# EAGLE board pic_board_with_lcd (EAGLE 6.1)
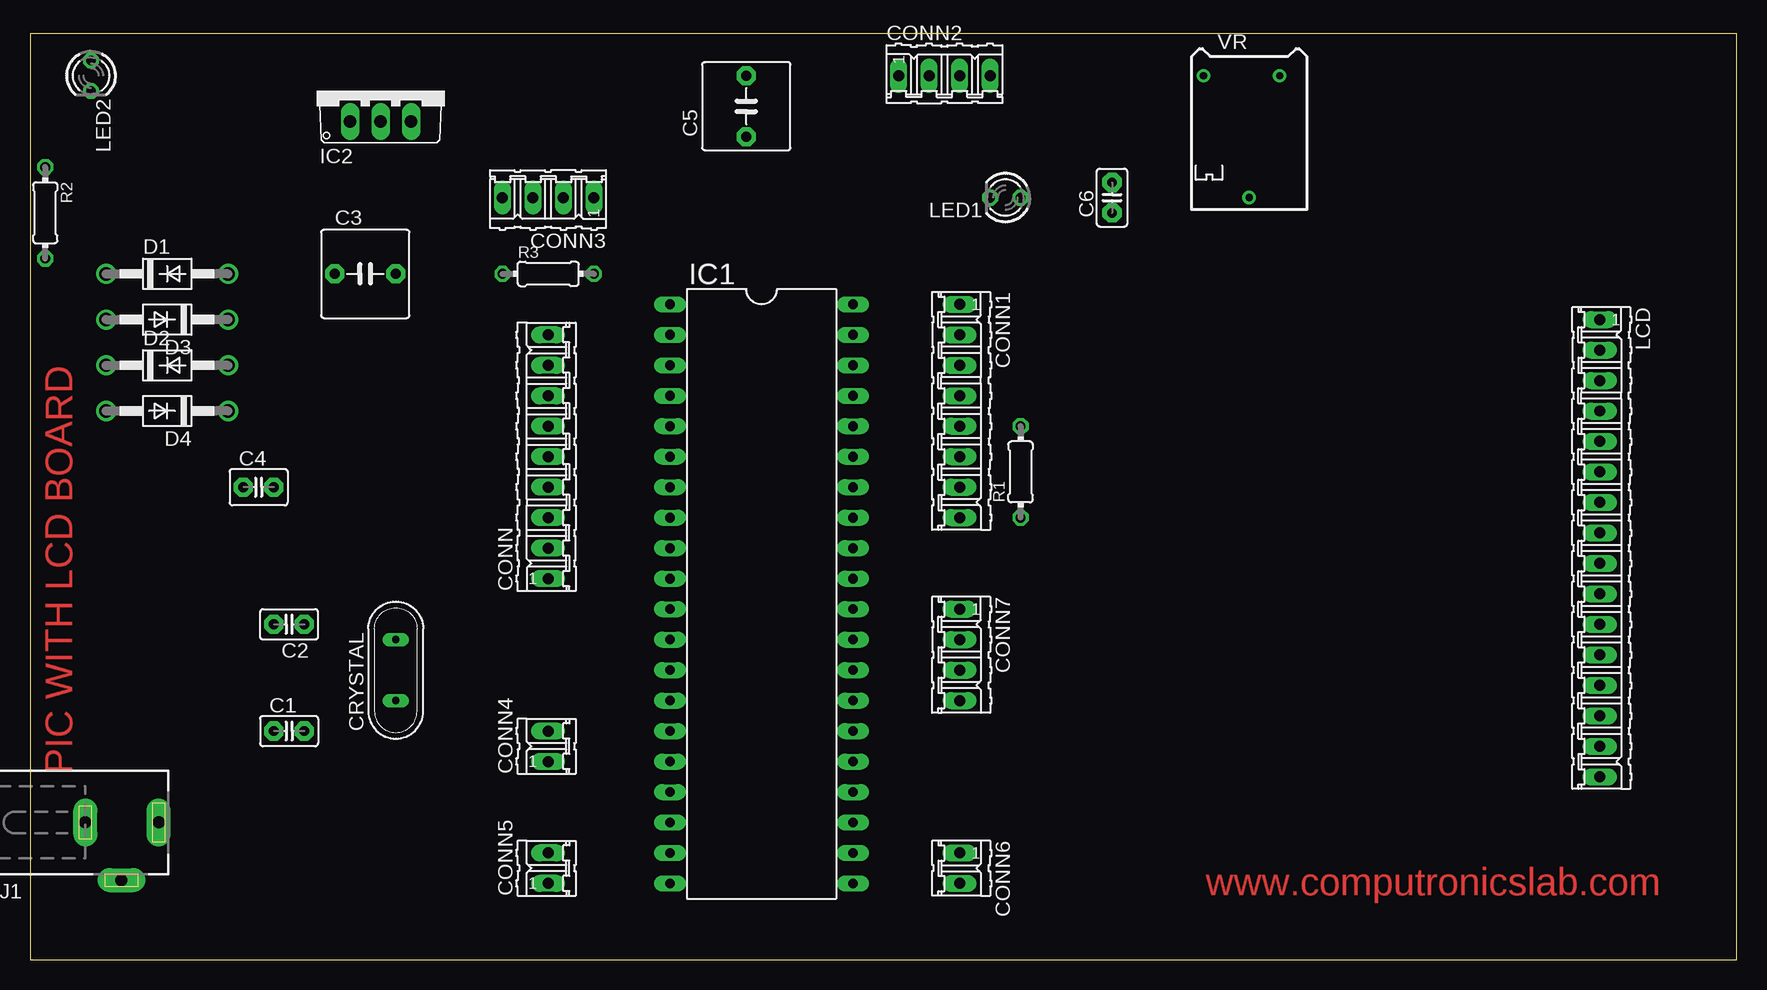
[diagram p0: board, top side]
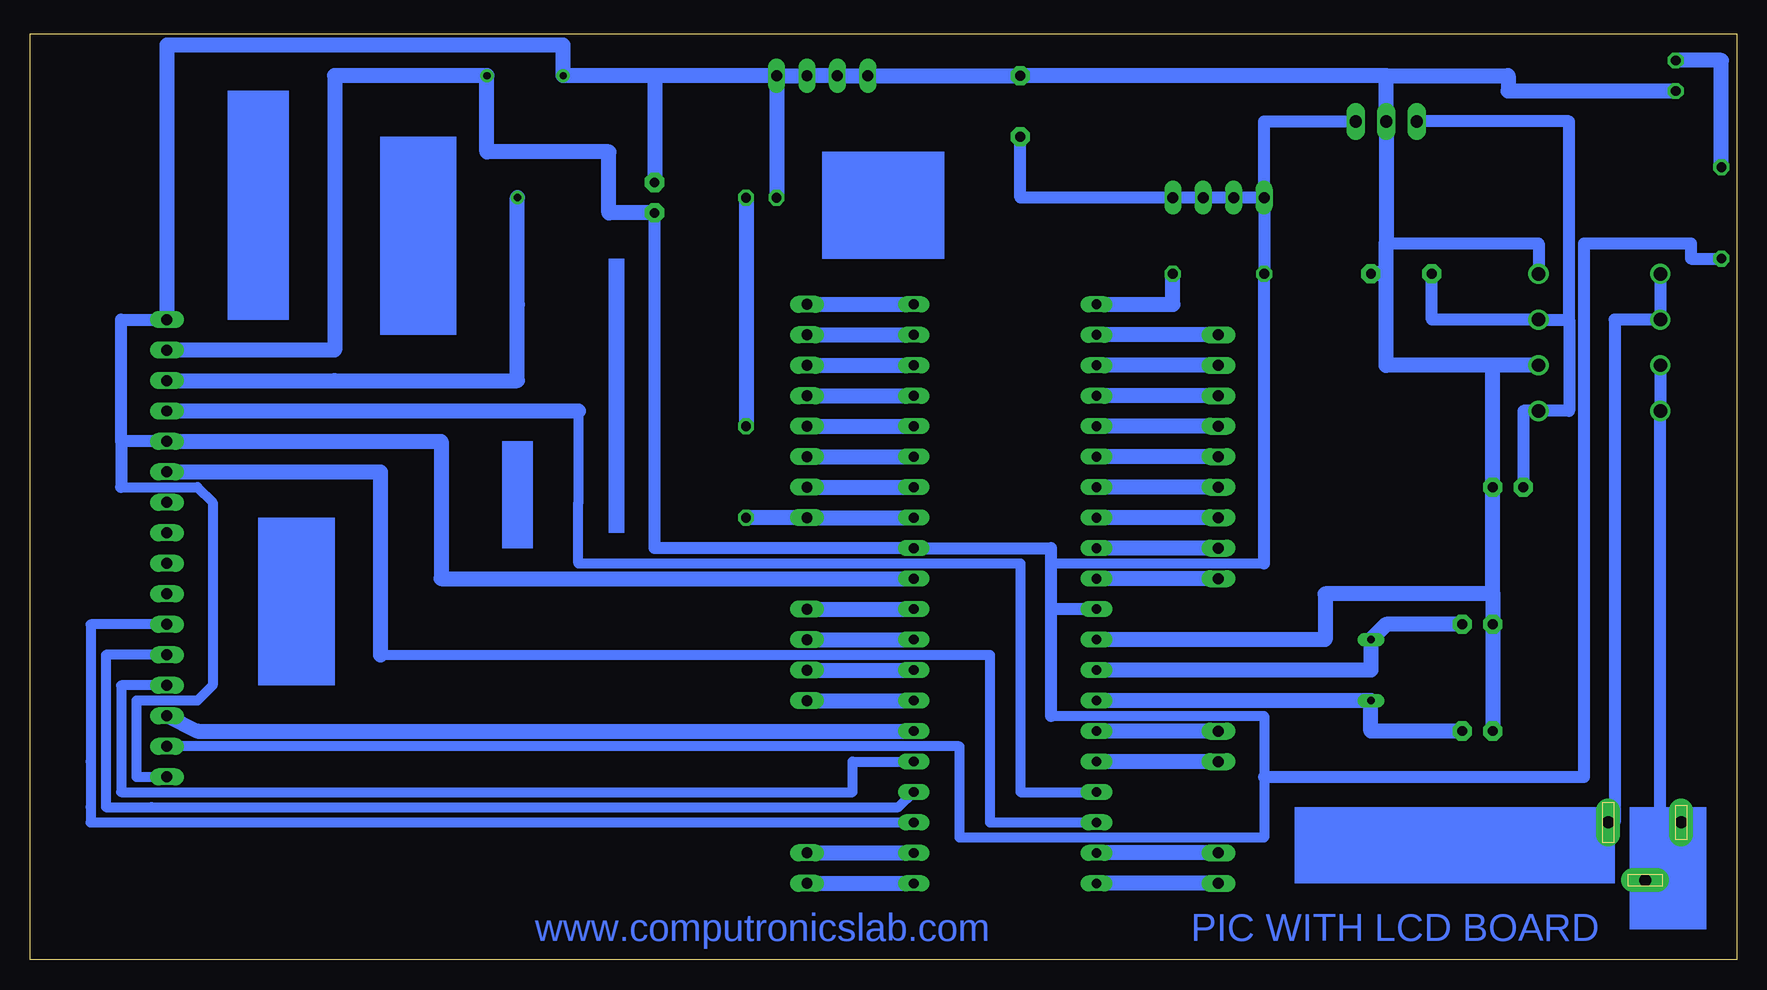
[diagram p1: board, bottom side, seen from below]

Size 142.22 x 77.14 mm. Coordinates in mm from the lower left corner, seen from the top.
Outline: 0,0 142.22,0 142.22,77.14 0,77.14 0,0
Copper layers (1*16): Top 0.035mm / dielectric 1.5mm / Bottom 0.035mm
Design rules: minimum track width 20mil, minimum drill 24mil, track to track 8mil, track to pad 8mil, pad to pad 8mil, via to via 8mil, smd to smd 8mil, copper to edge 40mil, drill to drill 8mil, minimum pad ring 10mil, minimum via ring 8mil, stop-mask expansion 4mil, vias tented up to drill 0mil, thermal gap 10mil

## Footprints (pad centres in the part's own frame; a part is rotated, then mirrored left to right if it is on the bottom)
C2.5-2 = drill 0.813 pad 1.6 octagon: 1 -1.27,0; 2 1.27,0
C5B7.2 = drill 0.813 pad 1.6 octagon: 1 -2.54,0; 2 2.54,0
C2.5-3 = drill 0.813 pad 1.6 octagon: 1 -1.27,0; 2 1.27,0
09P = drill 0.914 long: 1 -10.16,0; 2 -7.62,0; 3 -5.08,0; 4 -2.54,0; 5 0,0; 6 2.54,0; 7 5.08,0; 8 7.62,0; 9 10.16,0
08P = drill 0.914 long: 1 -8.89,0; 2 -6.35,0; 3 -3.81,0; 4 -1.27,0; 5 1.27,0; 6 3.81,0; 7 6.35,0; 8 8.89,0
04P = drill 0.914 long: 1 -3.81,0; 2 -1.27,0; 3 1.27,0; 4 3.81,0
02P = drill 0.914 long: 1 -1.27,0; 2 1.27,0
QS = drill 0.61 long: 1 -2.54,0; 2 2.54,0
DO41-10 = drill 1.118: A 5.08,0; C -5.08,0
DIL40 = drill 0.813 long: 1 -24.13,-7.62; 2 -21.59,-7.62; 3 -19.05,-7.62; 4 -16.51,-7.62; 5 -13.97,-7.62; 6 -11.43,-7.62; 7 -8.89,-7.62; 8 -6.35,-7.62; 9 -3.81,-7.62; 10 -1.27,-7.62; 11 1.27,-7.62; 12 3.81,-7.62; 13 6.35,-7.62; 14 8.89,-7.62; 15 11.43,-7.62; 16 13.97,-7.62; 17 16.51,-7.62; 18 19.05,-7.62; 19 21.59,-7.62; 20 24.13,-7.62; 21 24.13,7.62; 22 21.59,7.62; 23 19.05,7.62; 24 16.51,7.62; 25 13.97,7.62; 26 11.43,7.62; 27 8.89,7.62; 28 6.35,7.62; 29 3.81,7.62; 30 1.27,7.62; 31 -1.27,7.62; 32 -3.81,7.62; 33 -6.35,7.62; 34 -8.89,7.62; 35 -11.43,7.62; 36 -13.97,7.62; 37 -16.51,7.62; 38 -19.05,7.62; 39 -21.59,7.62; 40 -24.13,7.62
TO220V = drill 1.016 long: 1 -2.54,-2.54; 2 0,-2.54; 3 2.54,-2.54
DCJ0303 = drill 1 pad 2 long: 1 0,3.1; 2 4.8,0; 3 0,-3
16P = drill 0.914 long: 1 -19.05,0; 2 -16.51,0; 3 -13.97,0; 4 -11.43,0; 5 -8.89,0; 6 -6.35,0; 7 -3.81,0; 8 -1.27,0; 9 1.27,0; 10 3.81,0; 11 6.35,0; 12 8.89,0; 13 11.43,0; 14 13.97,0; 15 16.51,0; 16 19.05,0
LED3MM = drill 0.813 octagon: A -1.27,0; K 1.27,0
0204/7 = drill 0.813 octagon: 1 -3.81,0; 2 3.81,0
RTRIM64P = drill 0.61: 1 -2.54,-3.81; 2 7.62,0; 3 -2.54,2.54

## Placement (x,y rotation side)
C1  22pf  [C2.5-2]  21.59,19.05 0 top
C2  22pf  [C2.5-2]  21.59,27.94 180 top
C3  1000uf  [C5B7.2]  27.94,57.15 0 top
C4  0.1uf  [C2.5-3]  19.05,39.37 0 top
C5  100uf  [C5B7.2]  59.69,71.12 90 top
C6  22pf  [C2.5-2]  90.17,63.5 90 top
CONN  9 pin  [09P]  43.18,41.91 90 top
CONN1  7 pin  [08P]  77.47,45.72 270 top
CONN2  4 pin  [04P]  76.2,73.66 0 top
CONN3  4 pin  [04P]  43.18,63.5 180 top
CONN4  [02P]  43.18,17.78 90 top
CONN5  2pin  [02P]  43.18,7.62 90 top
CONN6  2pin  [02P]  77.47,7.62 270 top
CONN7  4 pin  [04P]  77.47,25.4 270 top
CRYSTAL  8MHZ  [QS]  30.48,24.13 90 top
D1  1N4007  [DO41-10]  11.43,57.15 0 top
D2  1N4007  [DO41-10]  11.43,49.53 0 top
D3  1N4007  [DO41-10]  11.43,53.34 180 top
D4  1N4007  [DO41-10]  11.43,45.72 180 top
IC1  PIC16f877a  [DIL40]  60.96,30.48 270 top
IC2  7805TV  [TO220V]  29.21,72.39 0 top
J1  [DCJ0303]  7.62,11.43 270 top
LCD  [16P]  130.81,34.29 270 top
LED1  3mm  [LED3MM]  81.28,63.5 180 top
LED2  3mm  [LED3MM]  5.08,73.66 270 top
R1  220E  [0204/7]  82.55,40.64 90 top
R2  220E  [0204/7]  1.27,62.23 270 top
R3  10K  [0204/7]  43.18,57.15 0 top
VR  10k  [RTRIM64P]  101.6,71.12 270 top

## Library data of the parts
C1-C6 = capacitor-wima
CONN CONN1-CONN7 LCD = con-amp-quick; OC_FARNELL: unknown; OC_NEWARK: unknown
CRYSTAL = special
D1-D4 = diode
IC1 = microchip; MF: MICROCHIP; MPN: PIC18F4455-I/P; OC_FARNELL: 9321314; OC_NEWARK: 05K2028
IC2 = linear
J1 = con-jack; OC_FARNELL: unknown; OC_NEWARK: unknown
LED1 LED2 = led
R1-R3 = rcl
VR = resistor

## Nets
N$1: C2.1 CRYSTAL.2 IC1.13
N$2: C1.2 CRYSTAL.1 IC1.14
N$3: LED1.A R1.2
N$4: CONN.1 IC1.10
N$5: CONN.2 IC1.9
N$6: CONN.3 IC1.8
N$7: CONN.4 IC1.7
N$8: CONN.5 IC1.6
N$9: CONN.6 IC1.5
N$10: CONN.7 IC1.4
N$11: CONN.8 IC1.3
N$12: CONN.9 IC1.2
N$13: CONN5.1 IC1.20
N$14: CONN5.2 IC1.19
N$15: CONN4.1 IC1.16
N$16: CONN4.2 IC1.15
N$17: IC1.17 LCD.4
N$18: CONN6.1 IC1.22
N$19: CONN1.1 IC1.40
N$20: CONN1.2 IC1.39
N$21: CONN1.3 IC1.38
N$22: CONN1.4 IC1.37
N$23: CONN1.5 IC1.36
N$24: CONN1.6 IC1.35
N$25: CONN1.7 IC1.34
N$26: CONN6.2 IC1.21
N$27: CONN7.1 IC1.30
N$28: CONN7.2 IC1.29
N$29: CONN1.8 IC1.33 R1.1
N$30: C3.1 C4.1 D3.C D4.C IC2.1
N$31: D2.C D4.A J1.2 J1.3
N$32: D1.C D3.A J1.1
N$33: C5.1 C6.1 CONN3.1 CONN3.2 CONN3.3 CONN3.4 IC1.11 IC1.32 IC2.3 LCD.2 LCD.15 R2.2 R3.1 VR.3
N$34: LED2.A R2.1
N$35: C1.1 C2.2 C3.2 C4.2 C5.2 C6.2 CONN2.1 CONN2.2 CONN2.3 CONN2.4 D1.A D2.A IC1.12 IC1.31 IC2.2 LCD.1 LCD.5 LCD.16 LED1.K LED2.K VR.1
N$36: CONN7.3 IC1.28
N$37: CONN7.4 IC1.27
N$38: IC1.23 LCD.11
N$39: IC1.1 R3.2
N$40: LCD.3 VR.2
N$41: IC1.24 LCD.12
N$42: IC1.25 LCD.13
N$43: IC1.26 LCD.14
N$46: IC1.18 LCD.6

## Tracks (layer width: path | path; a pad name or v marks a point on that pad's centre or on a via)
N$1
  Bottom 1.27: C2.1 29.21,27.94 CRYSTAL.2 30.48,24.13 IC1.13
N$2
  Bottom 1.27: C1.2 30.48,19.05 CRYSTAL.1 IC1.14
N$3
  Bottom 1.27: LED1.A R1.2
N$4
  Bottom 1.27: CONN.1 IC1.10
N$5
  Bottom 1.27: CONN.2 IC1.9
N$6
  Bottom 1.27: CONN.3 IC1.8
N$7
  Bottom 1.27: CONN.4 IC1.7
N$8
  Bottom 1.27: CONN.5 IC1.6
N$9
  Bottom 1.27: CONN.6 IC1.5
N$10
  Bottom 1.27: CONN.7 IC1.4
N$11
  Bottom 1.27: CONN.8 IC1.3
N$12
  Bottom 1.27: CONN.9 IC1.2
N$13
  Bottom 1.27: CONN5.1 IC1.20
N$14
  Bottom 1.27: CONN5.2 IC1.19
N$15
  Bottom 1.27: CONN4.1 IC1.16
N$16
  Bottom 1.27: CONN4.2 IC1.15
N$17
  Bottom 0.813: IC1.17 59.69,13.97 59.69,33.02 96.52,33.02 96.52,38.1 96.52,45.72
  Bottom 1.27: LCD.4 96.52,45.72
N$18
  Bottom 1.27: CONN6.1 IC1.22
N$19
  Bottom 1.27: CONN1.1 IC1.40
N$20
  Bottom 1.27: CONN1.2 IC1.39
N$21
  Bottom 1.27: CONN1.3 IC1.38
N$22
  Bottom 1.27: CONN1.4 IC1.37
N$23
  Bottom 1.27: CONN1.5 IC1.36
N$24
  Bottom 1.27: CONN1.6 IC1.35
N$25
  Bottom 1.27: CONN1.7 IC1.34
N$26
  Bottom 1.27: CONN6.2 IC1.21
N$27
  Bottom 1.27: CONN7.1 IC1.30
N$28
  Bottom 1.27: CONN7.2 IC1.29
N$29
  Bottom 1.27: IC1.33 CONN1.8 R1.1
N$30
  Bottom 1.016: C4.1 17.78,45.72 D4.C 13.97,45.72 13.97,53.34 | IC2.1 13.97,69.85 13.97,53.34 | 13.97,53.34 D3.C 25.4,53.34 C3.1
N$31
  Bottom 1.016: D2.C D4.A 6.35,11.43 5.08,11.43 | 5.08,11.43 5.08,7.62 7.62,7.62 J1.2 | 5.08,11.43 J1.3
N$32
  Bottom 1.016: D1.C D3.A 10.16,53.34 10.16,11.43 J1.1
N$33
  Bottom 0.813: 57.15,20.32 39.37,20.32 39.37,15.24 39.37,10.16 64.77,10.16 64.77,17.78 LCD.15 | 57.15,33.02 39.37,33.02
  Bottom 1.016: CONN3.4 R3.1 39.37,33.02 | CONN3.4 CONN3.3 CONN3.2 CONN3.1 59.69,63.5 C5.1 | IC2.3 39.37,69.85 CONN3.4 | 57.15,29.21 57.15,33.02 57.15,34.29 IC1.32 90.17,34.29 C6.1 | R2.2 3.81,58.42 3.81,59.69 12.7,59.69 12.7,15.24 39.37,15.24 | 57.15,29.21 57.15,20.32 | IC1.11 57.15,29.21
  Bottom 1.27: C6.1 93.98,62.23 93.98,67.31 104.14,67.31 VR.3 116.84,73.66 116.84,50.8 LCD.2
N$34
  Bottom 1.27: R2.1 1.27,74.93 LED2.A
N$35
  Bottom 0.813: LCD.16 133.35,15.24 133.35,21.59 128.27,21.59 127,22.86 127,38.1 128.27,39.37 134.62,39.37
  Bottom 1.016: 134.62,43.18 134.62,39.37 | LCD.5 134.62,43.18 | LCD.1 134.62,53.34 134.62,43.18 | D1.A 16.51,59.69 29.21,59.69
  Bottom 1.27: IC1.31 107.95,31.75 107.95,43.18 LCD.5 | CONN2.4 90.17,73.66 | 90.17,73.66 VR.1 97.79,76.2 130.81,76.2 LCD.1 | CONN2.4 LED1.K | 90.17,73.66 C6.2 | CONN2.4 CONN2.3 CONN2.2 CONN2.1 C5.2 29.21,73.66 | 29.21,73.66 19.05,73.66 19.05,72.39 LED2.K | 29.21,73.66 IC2.2 29.21,59.69 29.21,57.15 | 29.21,57.15 C3.2 | IC1.12 34.29,26.67 34.29,30.48 20.32,30.48 | C1.1 C2.2 20.32,30.48 | 20.32,30.48 C4.2 20.32,49.53 | 29.21,57.15 29.21,49.53 20.32,49.53 | D2.A 20.32,49.53
N$36
  Bottom 1.27: CONN7.3 IC1.28
N$37
  Bottom 1.27: CONN7.4 IC1.27
N$38
  Bottom 0.813: IC1.23 132.08,11.43 137.16,11.43 137.16,12.7 137.16,16.51 137.16,27.94 LCD.11
N$39
  Bottom 1.27: R3.2 46.99,54.61 IC1.1
N$40
  Bottom 1.27: VR.2 101.6,54.61 101.6,48.26 116.84,48.26 LCD.3
N$41
  Bottom 0.813: IC1.24 69.85,12.7 132.08,12.7 135.89,12.7 135.89,16.51 135.89,25.4 LCD.12
N$42
  Bottom 0.813: IC1.25 73.66,16.51 73.66,15.24 73.66,13.97 134.62,13.97 134.62,22.86 LCD.13
N$43
  Bottom 1.27: IC1.26 128.27,19.05 LCD.14
N$46
  Bottom 0.813: IC1.18 62.23,11.43 62.23,25.4 113.03,25.4
  Bottom 1.27: LCD.6 113.03,40.64 113.03,25.4
(copper drawn outside any net)
  shapes: Bottom area x10

## Text on the board
Top: PIC WITH LCD BOARD | www.computronicslab.com
Bottom: PIC WITH LCD BOARD | www.computronicslab.com